# EAGLE board Qwiic_Spectral_Sensor-AS7265x-Offset-MiddleJig (EAGLE 9.2.1)

Size 48.26 x 53.34 mm. Coordinates in mm from the lower left corner, seen from the top.
Outline: 0,50.8 arc-80 2.54,53.34 45.72,53.34 arc-80 48.26,50.8 48.26,2.54 arc-80 45.72,0 2.54,0 arc-80 0,2.54 0,50.8
Copper layers (1*16): Top 0.035mm / dielectric 1.5mm / Bottom 0.035mm
Design rules "SparkFun-2-layer-PCBWay-LIMIT": minimum track width 6mil, minimum drill 0.3mm, track to track 6mil, track to pad 6mil, pad to pad 6mil, via to via 6mil, smd to smd 6mil, copper to edge 6mil, drill to drill 6mil, minimum pad ring 6mil, minimum via ring 6mil, stop-mask expansion 4mil, vias tented up to drill 25mil, thermal gap 10mil
Net classes: 1 Power: width 0.305 mm
Holes 1.7 mm at 28.7,45.72 26.16,45.72 23.62,45.72 18.54,45.72 21.08,7.62 18.54,7.62 25.4,43.18 22.86,43.18 25.4,40.64 22.86,40.64 25.4,38.1 22.86,38.1 31.24,7.62 28.7,7.62 26.16,7.62 23.62,7.62 20.32,33.02

## Footprints (pad centres in the part's own frame; a part is rotated, then mirrored left to right if it is on the bottom)
STAND-OFF-TIGHT = hole 3.048: 0,0
NUBBIN_LOCKER = hole 2.794: 0,0

## Placement (x,y rotation side)
E$1  [STAND-OFF-TIGHT]  3.17,6.35 0 top
E$2  [STAND-OFF-TIGHT]  3.17,46.99 0 top
E$3  [STAND-OFF-TIGHT]  45.08,6.35 0 top
E$4  [STAND-OFF-TIGHT]  45.08,46.99 0 top
E$5  [NUBBIN_LOCKER]  24.13,2.03 0 top
E$6  [NUBBIN_LOCKER]  24.13,51.31 0 top
FRAME1  FRAME-LETTER  [CREATIVE_COMMONS]  62.23,-24.13 0 top  (outside the outline)
LOGO1  SFE_LOGO_NAME_FLAME.1_INCH  [SFE_LOGO_NAME_FLAME_.1]  36.07,13.97 0 top
LOGO4  OSHW-LOGOS  [OSHW-LOGO-S]  39.37,8.89 0 bottom
U$1  [#0]  36.19,32.26 60 bottom
U$2  [I_SUPER2_C-()-03]  11.94,38.86 0 top
U$3  [PWR-()-03]  13.46,35.56 0 top
U$4  [AS7265X0]  6.6,16.13 0 top
U$5  [BULB15]  16.76,32.89 300 bottom
U$6  [BULB26]  34.42,27.43 60 bottom
U$7  [BULB37]  21.21,15.24 180 bottom
U$8  [JP20]  14.6,35.18 90 bottom
U$9  [SPECTRAL1]  5.84,14.22 0 top
U$10  [STAT4]  31.11,35.56 0 top
U$11  [TRIAD2]  7.24,11.94 0 top
U$12  [TRIAD2]  15.49,11.94 0 bottom
U$13  [SPECTRAL1]  17.4,14.22 0 bottom
U$14  [AS7265X0]  16.38,16.13 0 bottom
U$15  [3V33]  21.84,40 90 bottom
U$16  [BLK7]  15.49,43.69 0 top
U$17  [GND5]  17.78,40.26 90 bottom
U$18  [GRN6]  27.94,43.69 0 top
U$19  [NC4]  30.48,41.15 90 bottom
U$20  [NC4]  20.32,41.15 90 bottom
U$21  [RXI2]  24.26,40.77 90 bottom
U$22  [SERIAL0]  27.69,39.37 0 bottom
U$23  [TXO1]  27.94,40.13 90 bottom
U$24  [3V3-04]  27.94,8 90 bottom
U$25  [GND-04]  30.48,8 90 bottom
U$26  [SDA-[)]  25.4,8 90 bottom
U$27  [SCL-[)]  22.86,8 90 bottom
U$28  [INT#-[<-04]  20.32,7.87 90 bottom
U$29  [RST#-[>-04]  17.78,7.87 90 bottom
U$30  [GND-04]  30.48,8 90 top
U$31  [3V3-04]  27.94,8 90 top
U$32  [SDA-[)]  25.4,8 90 top
U$33  [SCL-[)]  22.86,8 90 top
U$34  [INT#-[<-04]  20.32,7.87 90 top
U$35  [RST#-[>-04]  17.78,7.87 90 top
U$36  [#0]  12.19,32.64 300 bottom
U$37  [#0]  28.19,13.08 0 bottom
U$38  [#1]  22.48,12.95 0 bottom
U$39  [#1]  13.33,34.92 300 bottom
U$40  [#1]  37.34,30.1 60 bottom

## Library data of the parts
E$1-E$6 = SparkFun-Hardware
FRAME1 LOGO1 LOGO4 = SparkFun-Aesthetics
U$1 U$36-U$40 = buzzard_labels (7)
U$2 U$3 U$24-U$35 = Labels
U$4-U$7 U$9-U$14 = buzzard_labels (50)
U$8 = buzzard_labels (52)
U$15-U$23 = buzzard_labels (51)

## Tracks (layer width: path | path; a pad name or v marks a point on that pad's centre or on a via)
(copper drawn outside any net)
  shapes: Top area x1

## Text on the board
Top: Up-MiddleLayer
Bottom: Down-MiddleLayer
tPlace: #674 | Spectral Triad | SEN-15050
bPlace: GND
tDocu: Nathan Seidle